# Altium PCB SX1278.PcbDoc
Units mil, origin at the board's own origin, x right, y up, seen from the top; angles counter-clockwise.
Board outline 2510 x 2954 mil, 2 copper layers (Top Layer, Bottom Layer); 58 components, 37 nets, 293 pads, 135 vias.
Unrouted connection lines stored in the file: 7.
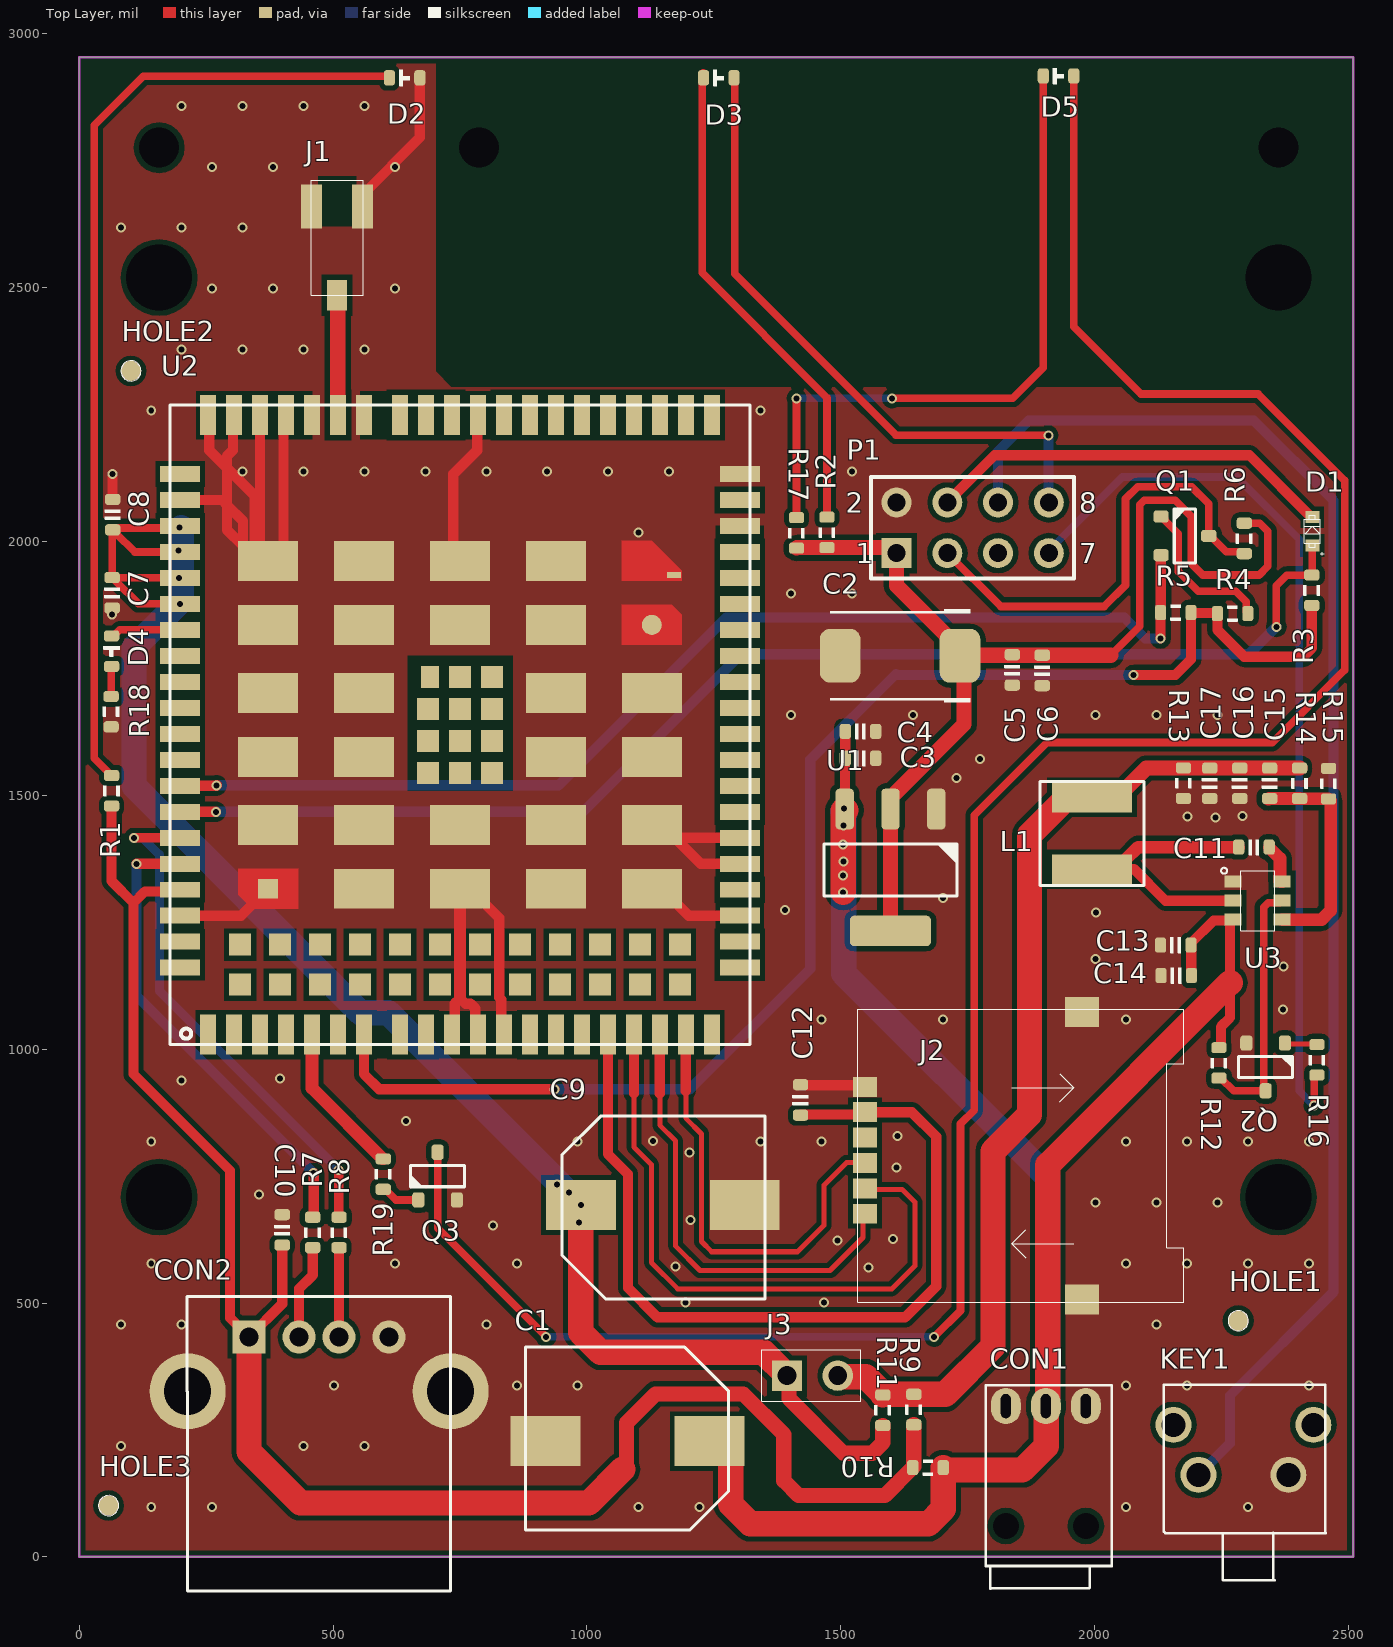
[diagram p0: Top Layer view]
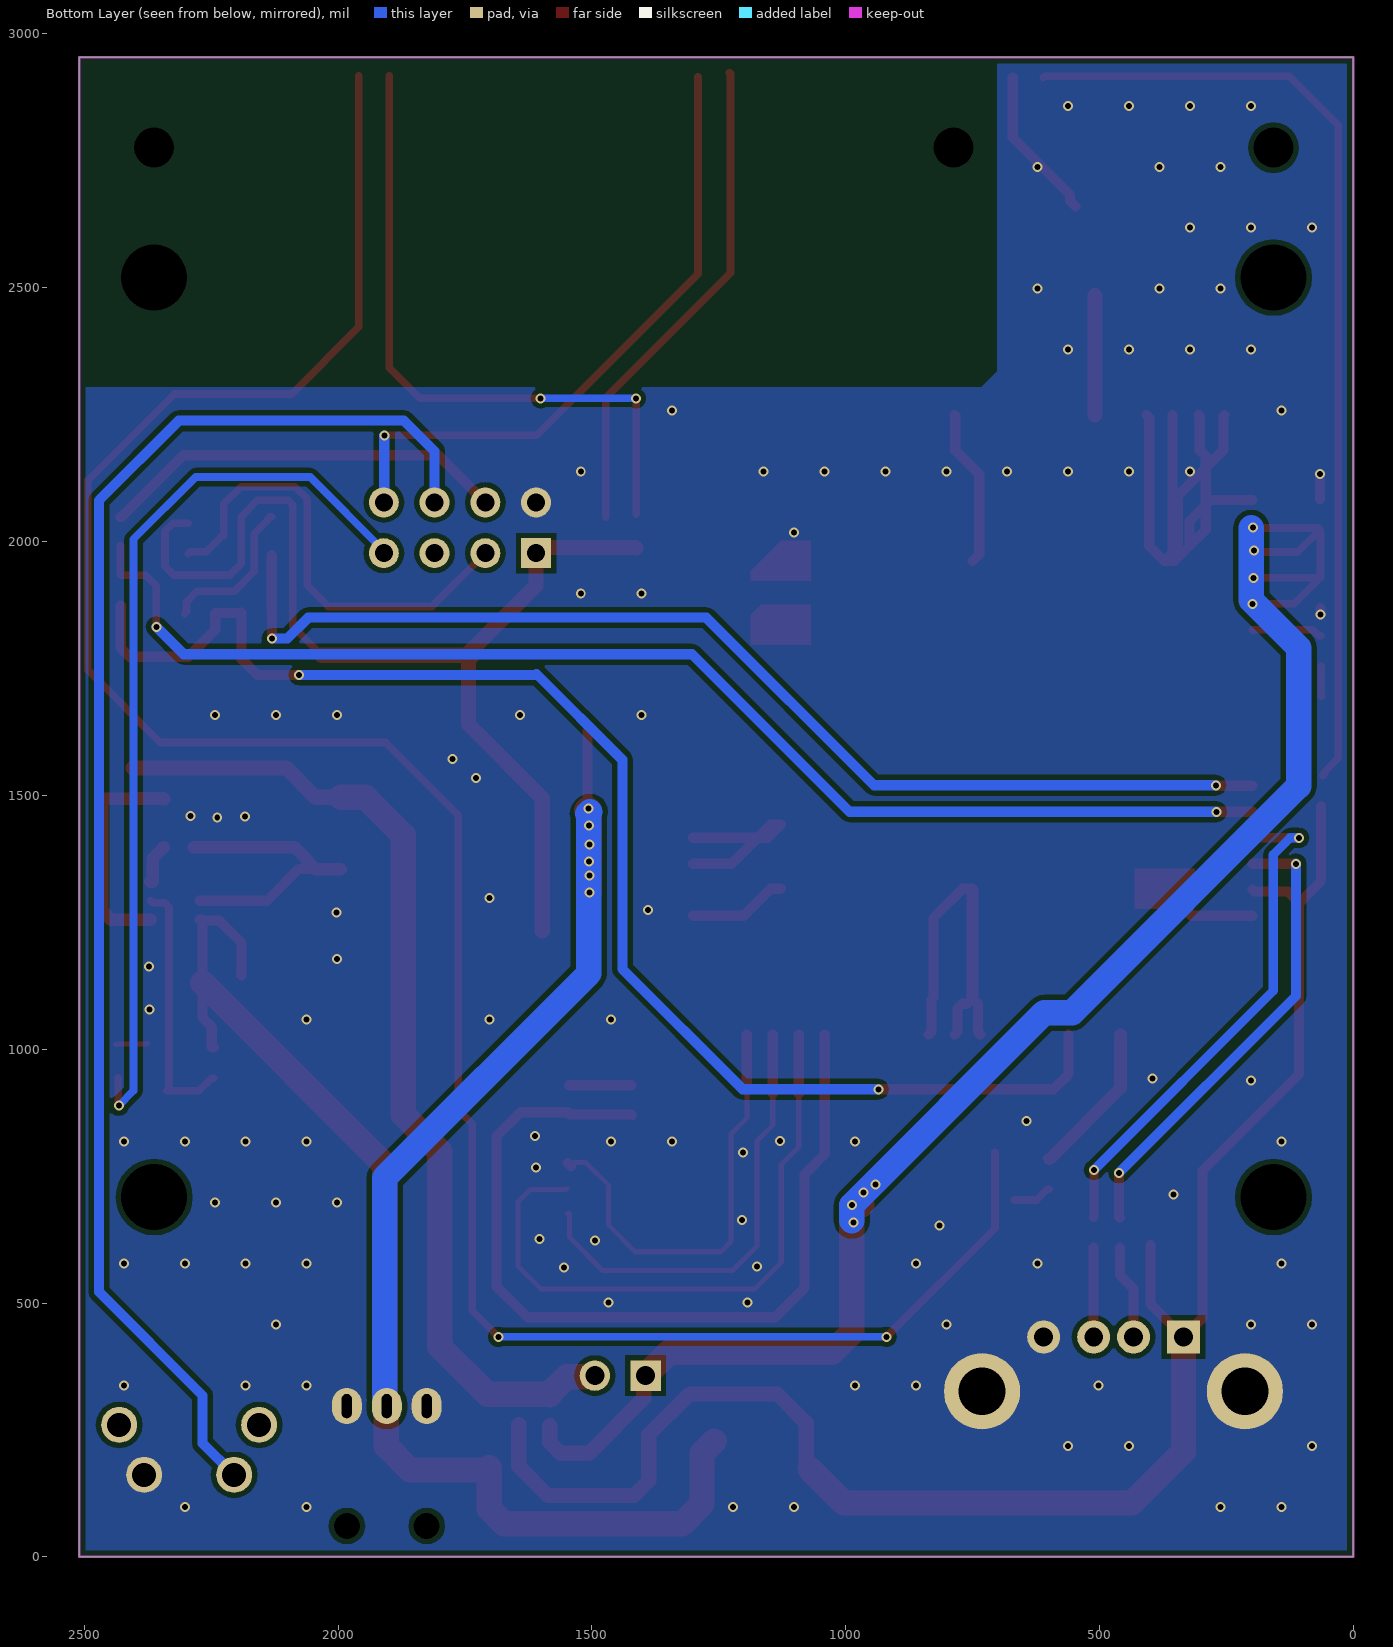
[diagram p1: Bottom Layer view, seen from below]
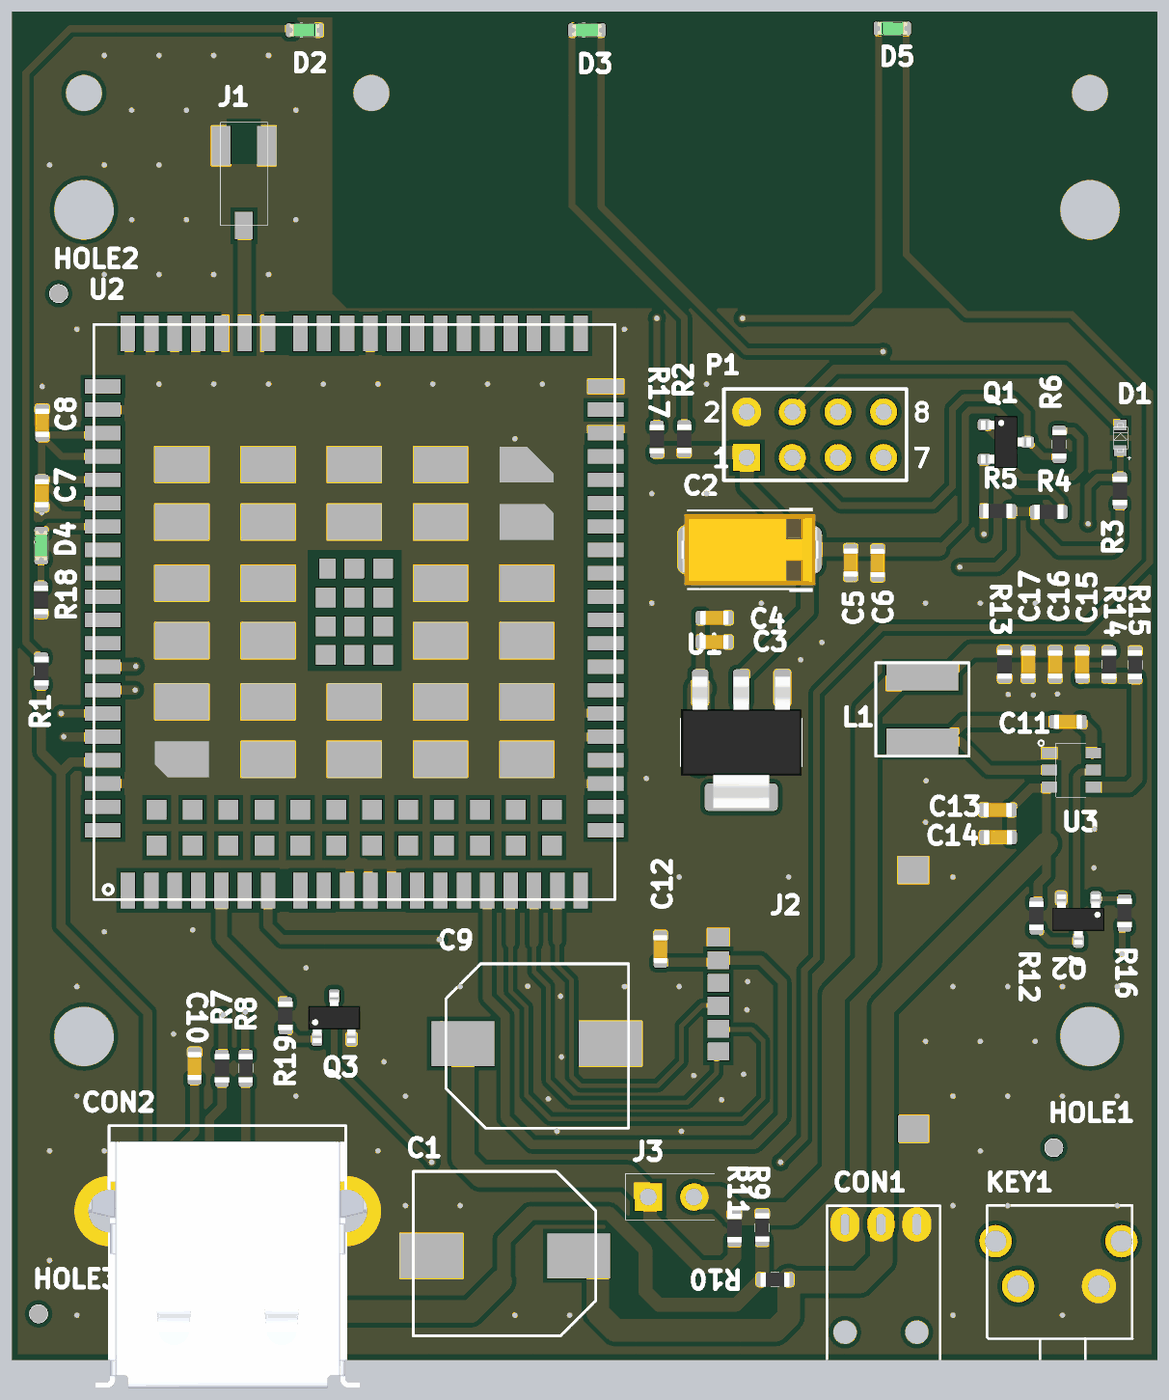
[diagram p2: 3D render of the assembled board from above, using the file's embedded part models]

## Layer stack, top to bottom
Top Solder: solder mask 0.4, Solder Resist, Dk 3.5
Top Layer: signal copper 1.4
Dielectric 1: dielectric 12.6, FR-4, Dk 4.8
Bottom Layer: signal copper 1.4
Bottom Solder: solder mask 0.4, Solder Resist, Dk 3.5

## Board outline
0,0 0,2954 2510,2954 2510,0

## Design rules (kind name [scope] priority, off if disabled: settings)
Clearance Clearance_9 [InNamedPolygon('Top Layer-GND')] p1: gap=10 ignorepadtopadclearanceinfootprint=FALSE except(0: Arc-Hole Track-Hole SMDPad-Hole THPad-Hole Via-Hole Fill-Hole Poly-Hole Region-Hole Text-Hole)
Clearance Clearance_8 [InNamedPolygon('Bottom Layer-GND')] p2: gap=10 ignorepadtopadclearanceinfootprint=FALSE
Clearance Clearance_7 [InNamedPolygon('Top Layer-GND')] p3: gap=30 ignorepadtopadclearanceinfootprint=FALSE
Clearance Clearance_6 [InNamedPolygon('Bottom Layer-GND')] p4: gap=30 ignorepadtopadclearanceinfootprint=FALSE
Clearance Clearance_5 [InNamedPolygon('Top Layer-GND')] p5: gap=30 ignorepadtopadclearanceinfootprint=FALSE
Clearance Clearance_4 [InNamedPolygon('Bottom Layer-GND')] p6: gap=10 ignorepadtopadclearanceinfootprint=FALSE except(0: Arc-Hole Track-Hole SMDPad-Hole THPad-Hole Via-Hole Fill-Hole Poly-Hole Region-Hole Text-Hole)
Clearance Clearance_3 [InNamedPolygon('Top Layer-N_IN')] p7: gap=10 ignorepadtopadclearanceinfootprint=FALSE except(0: Arc-Hole Track-Hole SMDPad-Hole THPad-Hole Via-Hole Fill-Hole Poly-Hole Region-Hole Text-Hole; 20: Arc-Arc Arc-Track Track-Track)
Clearance Clearance_2 [InNamedPolygon('Top Layer-N_IN')] p8: gap=10 ignorepadtopadclearanceinfootprint=FALSE except(0: Arc-Hole Track-Hole SMDPad-Hole THPad-Hole Via-Hole Fill-Hole Poly-Hole Region-Hole Text-Hole)
Clearance Clearance_1 [InNamedPolygon('Top Layer-N_IN')] p9: gap=10 ignorepadtopadclearanceinfootprint=FALSE except(0: Arc-Hole Track-Hole SMDPad-Hole THPad-Hole Via-Hole Fill-Hole Poly-Hole Region-Hole Text-Hole)
Clearance "Stitching No Net" [IsStitchingVia and InNet('No Net') vs (IsVia and (Not IsStitchingVia)) Or IsPad] p10: gap=39.37 ignorepadtopadclearanceinfootprint=FALSE
Clearance [All] p11: gap=6 ignorepadtopadclearanceinfootprint=FALSE
HoleSize [All] p1: absolutevalues=TRUE maxlimit=6000 minlimit=3 maxpercent=80.000 minpercent=20.000
HoleToHoleClearance [All] p1: gap=15.75 allowstackedmicrovias=TRUE
MinimumSolderMaskSliver [All] p1: minsoldermaskwidth=0
PlaneConnect [All] p1: planeconnectstyle=Direct reliefexpansion=20 reliefentries=4 reliefconductorwidth=10 reliefairgap=10
PolygonConnect [All] p1: connectstyle=Direct reliefconductorwidth=10 reliefentries=4 polygonreliefangle="90 Angle" airgapwidth=10
RoutingVias [All] p1: holewidth=11.81 width=19.68 viastyle="Through Hole" minholewidth=11.81 minwidth=19.68 maxholewidth=30.81 maxwidth=780.74
SilkToSilkClearance [All] p1: silktosilkclearance=0
SilkToSolderMaskClearance [IsPad] p1: minsilkscreentomaskgap=0 clearancetoexposedcopper=TRUE
SolderMaskExpansion [All] p1: expansion=1.97 useseparateexpansions=TRUE expansionbottom=1.97
Width [All] p1: maxlimit=200 minlimit=6 preferedwidth=10
24 further rules are at their usual default settings.

## Components (designator, comment, footprint, x,y, rotation, side; value= is the part's Value field where it differs from the comment)
C1 "CAP-AL-1000UF-8X10.5" CAP-AL-1000UF-10X12 1114,228 r180 top value=1000uF
C2 "NC" CAP_TAN_D2917 1617,1775 r180 top
C3 "106" CAP_0603 1539,1573 r180 top
C4 "104" CAP_0603 1539,1626 r180 top
C5 "106" CAP_0603 1838,1747 r90 top
C6 "104" CAP_0603 1897,1746 r90 top
C7 "106" CAP_0603 65,1899 r270 top
C8 "106" CAP_0603 66,2053 r90 top
C9 "CAP-AL-1000UF-8X10.5" CAP-AL-1000UF-10X12 1116,693 r0 top value=1000uF
C10 "106" CAP_0603 400,644 r270 top
C11 "104" CAP_0603 2314,1398 r0 top
C12 "106" CAP_0603 1421,900 r270 top
C13 "106" CAP_0603 2160,1205 r0 top
C14 "106" CAP_0603 2161,1145 r0 top
C15 "104" CAP_0603 2345,1523.76 r90 top
C16 "106" CAP_0603 2286,1523.76 r90 top
C17 "106" CAP_0603 2227,1523.76 r90 top
CON1 "PowerJack_2.5" DC003A 1786,-18 r0 top
CON2 "USB_TypeA" USB_TypeA 334.65,433.07 r180 top
D1 "DIODE-SCHOTTKY-RB521S-30" SOD523(RB521S) 2429.1,2020 r270 top
D2 "color?" LED_0603_GREEN 641,2913.39 r0 top
D3 "color?" LED_0603_GREEN 1259.84,2913.39 r0 top
D4 "color?" LED_0603_GREEN 64,1784 r270 top
D5 "color?" LED_0603_GREEN 1929.13,2917 r0 top
HOLE1 "TP-1.0MM" TP-1MM 2283,465 r90 top
HOLE2 "TP-1.0MM" TP-1MM 102,2336 r90 top
HOLE3 "TP-1.0MM" TP-1MM 58,101 r90 top
J1 "NC" RF-ANT-HJ 508,2660 r0 top
J2 "MICRO-SIM-S0HG-180006-03G" S0HG-180006-03G 1975,790 r270 top
J3 "DIP2X1-2.54" DIP2X1-2.54 1394.21,357 r0 top
KEY1 "KEY" key_4 2204.72,161.57 r0 top
L1 "LVS505020-4R7M-N" LVS505020-4R7M-N 1995,1425.13 r180 top value=6.8uH
P1 "Header 4X2" HDR2X4 1610,1977 r0 top
Q1 "FET-N-NTA4153NT1G" SOT23-3 2178,2011 r0 top
Q2 "9304" SOT23-3 2337,965 r270 top
Q3 "9304" SOT23-3 706,750 r90 top
R1 "10k" RES_0603 64,1509 r90 top
R2 "4.7k" RES_0603 1473,2018 r90 top
R3 "10K" RES_0603 2428,1904 r90 top
R4 "33" RES_0603 2272,1858 r0 top
R5 "10K" RES_0603 2160,1860 r180 top
R6 "10K" RES_0603 2295,2006 r270 top
R7 "NC" RES_0603 460,639 r90 top
R8 "NC" RES_0603 512,639 r90 top
R9 "0" RES_0603 1644,290.22 r270 top
R10 "NC" RES_0603 1672,176 r180 top
R11 "0" RES_0603 1583,289 r270 top
R12 "10K" RES_0603 2245,973 r270 top
R13 "4.7K" RES_0603 2175,1524 r90 top
R14 "100K" RES_0603 2404,1523.76 r90 top
R15 "18K" RES_0603 2461,1523 r270 top
R16 "10K" RES_0603 2438,979 r90 top
R17 "4.7K" RES_0603 1413,2017 r270 top
R18 "1K" RES_0603 63,1665 r90 top
R19 "10K" RES_0603 599,754 r270 top
U1 "LDO1117" SOT223-3 1598,1353 r270 top
U2 "AIR720_A14" AIR726-A 750.05,1638.83 r90 top
U3 "JW5033H" JW5033S 2321.23,1292.4 r270 top

## Footprints (in the part's own frame and the unit in brackets; to place one, negate y for a bottom-side part, rotate by r counter-clockwise, add the part's x,y. Pads: shape width x height; smd on the part's side, far side on the other; paste and mask are expansions set on the pad)
AIR726-A [mm]
  rect 2x0.8 smd: 1(-15.5,12.6) 2(-15.5,11.3) 3(-15.5,10) 4(-15.5,8.7) 5(-15.5,7.4) 6(-15.5,6.1) 7(-15.5,4.8) 8(-15.5,0.4) 9(-15.5,-0.9) 10(-15.5,-2.2) 11(-15.5,-3.5) 12(-15.5,-4.8) 13(-15.5,-6.1) 14(-15.5,-7.4) 15(-15.5,-8.7) 16(-15.5,-10) 17(-15.5,-11.3) 18(-15.5,-12.6) 37(15.5,-12.6) 38(15.5,-11.3) 39(15.5,-10) 40(15.5,-8.7) 41(15.5,-7.4) 42(15.5,-6.1) 43(15.5,-4.8) 44(15.5,-3.5) 45(15.5,-2.2) 46(15.5,-0.9) 47(15.5,0.4) 48(15.5,4.8) 49(15.5,6.1) 50(15.5,7.4) 51(15.5,8.7) 52(15.5,10) 53(15.5,11.3) 54(15.5,12.6) 141(-15.5,3) 142(-15.5,1.7) 143(15.5,1.7) 144(15.5,3)
  rect 0.8x2 smd: 19(-9.55,-14) 20(-8.25,-14) 21(-6.95,-14) 22(-5.65,-14) 23(-4.35,-14) 24(-3.05,-14) 25(-1.75,-14) 26(-0.45,-14) 27(0.85,-14) 28(2.15,-14) 29(3.45,-14) 30(4.75,-14) 31(6.05,-14) 32(7.35,-14) 33(8.65,-14) 34(9.95,-14) 35(11.25,-14) 36(12.55,-14) 55(12.55,14) 56(11.25,14) 57(9.95,14) 58(8.65,14) 59(7.35,14) 60(6.05,14) 61(4.75,14) 62(3.45,14) 63(2.15,14) 64(0.85,14) 65(-0.45,14) 66(-1.75,14) 67(-3.05,14) 68(-4.35,14) 69(-5.65,14) 70(-6.95,14) 71(-8.25,14) 72(-9.55,14) 113(-10.85,14) 114(-12.15,14) 115(-10.85,-14) 116(-12.15,-14)
  rect 1.1x0.9 smd: 73(2.4,1.5)
  rect 1.1x1.1 smd: 74(2.4,0) 75(2.4,-1.6) 76(0.8,1.6) 77(0.8,0) 78(0.8,-1.6) 79(-0.8,1.6) 80(-0.8,0) 81(-0.8,-1.6) 82(-2.4,1.6) 83(-2.4,0) 84(-2.4,-1.6) 117(-11,11) 118(-11,9) 119(-11,7) 120(-11,5) 121(-11,3) 122(-11,1) 123(-11,-1) 124(-11,-3) 125(-11,-5) 126(-11,-7) 127(-11,-9) 128(-11,-11) 129(-13,11) 130(-13,9) 131(-13,7) 132(-13,5) 133(-13,3) 134(-13,1) 135(-13,-1) 136(-13,-3) 137(-13,-5) 138(-13,-7) 139(-13,-9) 140(-13,-11)
  rect 2x3 smd: 85(8.2,9.6) 86(8.2,4.8) 87(8.2,0) 88(8.2,-4.8) 90(5,9.6) 91(5,4.8) 92(5,0) 93(5,-4.8) 95(1.6,9.6) 96(1.6,4.8) 97(1.6,-4.8) 98(1.6,-9.6) 99(-1.6,9.6) 100(-1.6,4.8) 101(-1.6,-4.8) 102(-1.6,-9.6) 103(-5,9.6) 104(-5,4.8) 105(-5,0) 106(-5,-4.8) 107(-5,-9.6) 109(-8.2,4.8) 110(-8.2,0) 111(-8.2,-4.8) 112(-8.2,-9.6)
  rect 0.3x0.7 smd: 89(7.5,-10.7)
  round 1 smd: 94(5,-9.6)
  rect 1x1 smd: 108(-8.2,9.6)
  Top Layer pour cut-out: 14.3,13.2 16.7,13.2 16.7,7.4 14.3,7.4 14.3,13.2
  Top Layer pour cut-out: -3.3,2.6 3.45,2.6 3.45,-2.65 -3.3,-2.65 -3.3,2.6
  Top Layer pour cut-out: -14.3,-13.2 -16.7,-13.2 -16.7,13.2 -14.3,13.2 -14.3,-13.2
  Top Layer pour cut-out: 9.95,-15.2 -12.8,-15.2 -12.8,-12.8 9.95,-12.8 9.95,-15.2
  Top Layer pour cut-out: 14.3,5 16.7,5 16.7,-13.2 14.3,-13.2 14.3,5
  Top Layer pour cut-out: -12.8,15.2 13.15,15.2 13.15,12.8 -12.8,12.8 -12.8,15.2
  Top Layer region: -8.5,11.1 -9.2,10.4 -9.2,8.1 -7.2,8.1 -7.2,11.1 -8.5,11.1
  Top Layer region: 4,-8.1 6,-8.1 6,-10.6 5.5,-11.1 4,-11.1 4,-8.1
  Top Layer region: 7.2,-8.1 9.2,-8.1 9.2,-9.6 7.7,-11.1 7.2,-11.1 7.2,-8.1
  silkscreen extent -16,-14.5 16,14.5
CAP-AL-1000UF-10X12 [mm]
  rect 3.5x2.5 smd: 1(-3.25,0) 2(4.953,0)
  silkscreen extent -4.2,-4.7 5.97,4.45
CAP_0603 [mil]
  rrect50% 22x30 smd: 1(-30,0) 2(30,0)
  silkscreen extent -10,-15 10,15, body extent -31,-16 31,16, height 31
CAP_TAN_D2917 [mil]
  rrect50% 80x106 smd: 1(-118,0) 2(118,0)
  silkscreen extent -138,-92 138,92, body extent -150,-78 150,78, height 122
DC003A [mm] "DC003A 母座 3.5*1.3"
  oval 1.5x1.8 hole 0.5 slot 1.2 at 90 deg: 1(3,8) 2(1,8) 3(5,8)
  round 0 hole 1.3: ""(1,2) ""(5,2)
  silkscreen extent 0,-1.14 6.3,9.04
DIP2X1-2.54 [mil]
  rect 60x60 hole 37: 1(0,0)
  round 60 hole 37: 2(100,0)
  silkscreen extent -50,-50 146,51
HDR2X4 [mm] "Connector; Header; 4x2 Position"
  rect 1.5x1.5 hole 0.9: 1(0,0)
  round 1.5 hole 0.9: 2(0,2.54) 3(2.54,0) 4(2.54,2.54) 5(5.08,0) 6(5.08,2.54) 7(7.62,0) 8(7.62,2.54)
  silkscreen extent -1.27,-1.27 8.89,3.81
JW5033S [mm]
  rect 0.6x0.85 smd: 1(-0.95,-1.225) 2(0,-1.225) 3(0.95,-1.225) 4(0.95,1.225) 5(0,1.225) 6(-0.95,1.225)
  silkscreen extent -1.65,-1.83 1.5,0.85
key_4 [mm]
  round 1.8 hole 1.2: 1(0,0) 2(4.5,0) ""(-1.25,2.5) ""(5.75,2.5)
  silkscreen extent -1.73,-5.28 6.38,4.5
LED_0603_GREEN [mil]
  rrect50% 22x30 smd: 1(-30,0) 2(30,0)
  silkscreen extent -10,-16 10,16, body extent -32,-16 32,16, height 24
LVS505020-4R7M-N [mm]
  rect 4x1.5 smd: 1(0,1.8) 2(0,-1.8)
  silkscreen extent -2.6,-2.6 2.6,2.6
RES_0603 [mil]
  rrect50% 22x30 smd: 1(-30,0) 2(30,0)
  silkscreen extent -10,-16 10,16, body extent -31,-16 31,16, height 18
RF-ANT-HJ [mm]
  rect 1.05x2.2 smd: 1(-1.27,0) 3(1.27,0)
  rect 1x1.533 smd: 2(0,-4.445)
  Top Layer pour cut-out: -0.95,1.5 0.95,1.5 0.95,-1.003 -0.95,-1.003 -0.95,1.5
  silkscreen extent -1.3,-4.44 1.3,1.3
S0HG-180006-03G [mm]
  rect 1x1.2 smd: 1(1.63,-10.85) 2(-0.91,-10.85) 3(-3.45,-10.85) 4(-2.18,-10.85) 5(0.36,-10.85) 6(2.9,-10.85)
  rect 1.5x1.7 smd: 7(-7.2,0) 8(7.2,0)
  silkscreen extent -7.33,-11.2 7.33,5.1
SOD523(RB521S) [mm]
  rect 0.6x0.7 smd: 1(-0.71,0) 2(0.71,0)
  silkscreen extent -0.8,-0.4 1.2,0.59
SOT23-3 [mil]
  rrect50% 30x24 smd: 1(-47,38) 2(-47,-38) 3(47,0)
  silkscreen extent -21,-53 21,53, body extent -55,-57 55,57, height 51
SOT223-3 [mil]
  rrect40% 80x36 smd: 1(-120,90.16) 2(-120,0) 3(-120,-90.16)
  rrect30% 60x160 smd: 4(120,0)
  silkscreen extent -51,-131 51,131, body extent -144,-132 144,132, height 71
TP-1MM [mil]
  round 40 smd: 1(0,0)
  Top Layer pour cut-out: 26.18,0 26.15,1.37 26.04,2.74 25.86,4.1 25.61,5.44 25.29,6.78 24.9,8.09 24.44,9.38 23.92,10.65 23.33,11.89 22.67,13.09 21.96,14.26 21.18,15.39 20.35,16.48 19.46,17.52 18.51,18.51 17.52,19.46 16.48,20.35 15.39,21.18 14.26,21.96 13.09,22.67 11.89,23.33 10.65,23.92 9.38,24.44 8.09,24.9 6.78,25.29 5.44,25.61 4.1,25.86 2.74,26.04 1.37,26.15 0,26.18 -1.37,26.15 -2.74,26.04 -4.1,25.86 -5.44,25.61 -6.78,25.29 -8.09,24.9 -9.38,24.44 -10.65,23.92 -11.89,23.33 -13.09,22.67 -14.26,21.96 -15.39,21.18 -16.48,20.35 -17.52,19.46 -18.51,18.51 -19.46,17.52 -20.35,16.48 -21.18,15.39 -21.96,14.26 -22.67,13.09 -23.33,11.89 -23.92,10.65 -24.44,9.38 -24.9,8.09 -25.29,6.78 -25.61,5.44 -25.86,4.1 -26.04,2.74 -26.15,1.37 -26.18,0 -26.15,-1.37 -26.04,-2.74 -25.86,-4.1 -25.61,-5.44 -25.29,-6.78 -24.9,-8.09 -24.44,-9.38 -23.92,-10.65 -23.33,-11.89 -22.67,-13.09 -21.96,-14.26 -21.18,-15.39 -20.35,-16.48 -19.46,-17.52 -18.51,-18.51 -17.52,-19.46 -16.48,-20.35 -15.39,-21.18 -14.26,-21.96 -13.09,-22.67 -11.89,-23.33 -10.65,-23.92 -9.38,-24.44 -8.09,-24.9 -6.78,-25.29 -5.44,-25.61 -4.1,-25.86 -2.74,-26.04 -1.37,-26.15 0,-26.18 1.37,-26.15 2.74,-26.04 4.1,-25.86 5.44,-25.61 6.78,-25.29 8.09,-24.9 9.38,-24.44 10.65,-23.92 11.89,-23.33 13.09,-22.67 14.26,-21.96 15.39,-21.18 16.48,-20.35 17.52,-19.46 18.51,-18.51 19.46,-17.52 20.35,-16.48 21.18,-15.39 21.96,-14.26 22.67,-13.09 23.33,-11.89 23.92,-10.65 24.44,-9.38 24.9,-8.09 25.29,-6.78 25.61,-5.44 25.86,-4.1 26.04,-2.74 26.15,-1.37 26.18,0
  silkscreen extent -20,-20 20,20
USB_TypeA [mil]
  rect 65x65 hole 37: 1(0,0)
  round 65 hole 37: 2(-98.5,0) 3(-177,0) 4(-275.6,0)
  round 150 hole 93: 4(-397,107) 4(121,107)
  silkscreen extent -397,-80 122,500, body extent -449,-45 173,494, height 274

## Part data
C1 C9: "贴片电解电容,1000uF/10V", Geometry.Height="10.4 mm", PCB DECAL=CAP-AL-1000UF-8X10.5
C2: library part Cap_Tan_2917, "Capacitor Tantalum", Type=2917
C3 C4 C5 C6 C7 C8 C10 C11 C12 C13 C14 C15 C16 C17: library part Cap_0603, "Capacitor", Type=0603
CON1: "DC Power Jack"
CON2: "USB"
D1: "Schottky Diode;30V;200mA/0.6V;SOD-523;0.7mm;ROHS", Manufacture 1=Panjit;WILL;KEC;Onsemi;, Manufacture 1 P/N=RB521S30T1G;KDR730E;RB521S30-2/TR;RB521S30/TR, Geometry.Height=0.7mm, PCB DECAL=SOD523(RB521S), Serial Number=81210000004
D2 D3 D4 D5: library part LED_0603, "LED", Type=0603
HOLE1 HOLE2 HOLE3: "TP-1mm", Geometry.Height=0.05mm, PCB DECAL=TP-1MM
J1: library part RF-ANT-SOCKET-U.FL-R-SMT, "RF CONNECTOR;3*3*1.25mm;ROHS", Manufacture 1=Hirose, Manufacture 1 P/N=U.FL-R-SMT, Part Number=1120333002051, Geometry.Height=1.25mm, PCB DECAL=RF-ANT-SOCKET-U.FL-R-SMT, Serial Number=80830000004
J2: "1.8H掀盖 Micro SIM卡座;16.3*14.66*1.8mm", Manufacture 1=深圳市精睿兴业科技有限公司, Manufacture 1 P/N=S0HG-180006-03G, Geometry.Height=1.8mm, PCB DECAL=S0HG-180006-03G
L1: Manufacture 1=Chilisin(奇力新), Geometry.Height="2.2 mm", PCB DECAL=LVS505020-4R7M-N
P1: "Header, 4-Pin, Dual row", LatestRevisionDate=17-Jul-2002, LatestRevisionNote="Re-released for DXP Platform.", Publisher="Altium Limited"
Q1: "MOSFET;N-Ch", Manufacture 1 P/N=WNM2030, Geometry.Height=0.55mm, PCB DECAL=SOT-723
Q2 Q3: library part BJT_NPN, "Transistor", Type=NPN
R1 R2 R3 R4 R5 R6 R7 R8 R9 R10 R11 R12 R13 R14 R15 R16 R17 R18 R19: library part Res_0603, "Resistor", Type=0603
U1: "Power", Type=SOT223-3
J3: Geometry.Height=2mm, PCB DECAL=DIP2X1-2.54
U2: PCB DECAL=AIR726
U3: Geometry.Height=1.1mm, PCB DECAL=JW5033S

## Free pads (board coordinates)
  round 0 hole 129.92: 0(157.48,708.66) 0(157.48,2519.68) 0(2362.2,708.66) 0(2362.2,2519.68)
  round 0 hole 78.74: 0(157.48,2775.59) 0(787.4,2775.59) 0(2362.2,2775.59)

## Via types
v1: diameter 19.68, hole 11.81, Top Layer to Bottom Layer, tented both sides, 135 vias

## Nets (pads, with @x,y where several pads share a name; then routed paths per layer and width w, separated by ;. In a path a pad name is that pad's centre, name@x,y a point inside that pad or via, vN(x,y) a via of type N, cw(c..) or ccw(c..) an arc to the next point about the centre after c; other vN are vias at no path point)
1V8: R3.1 R4.1 R5.1 U2.7 | length 2788.7
  Top Layer w20: U2.7 561.07,950.93 591,921 v1(936,921) ; v1(2077,1737) 2159,1737 2190,1768 R5.1 2191,1859 2241,1859 R4.1 2242,1826 2295,1773 2411,1773 2428,1790 R3.1
  Bottom Layer w20: v1(936,921) 1203,921 1440,1158 1440,1570 1609,1739 1611,1737 v1(2077,1737)
3V3: C2.1 C5.2 C6.2 P1.1 R2.1 R6.1 R17.2 U1.2 U1.4 | length 2177.9
  Top Layer w15: 2032,1776 2089,1833 2089,2072 2098,2081 2159,2081 2191,2049 2191,1956 2213,1934 2324,1934 2341,1951 2341,2020 2325,2036 R6.1
  Top Layer w30: R17.2 1414,1988 R2.1 1599,1988 P1.1 1610,1913 1743,1780 C2.1@1743,1776 ; U1.4 U1.2 1598,1495 1743,1640 C2.1@1743,1776 ; C2.1 1736,1776 C2.1@1743,1776 ; 2032,1776 C6.2 C2.1@1743,1776
4G_RX: D1.2 R3.2 U2.68 | length 2527.5
  Top Layer w15: v1(2358,1832) 2358,1913 2378.5,1933.5 2427.5,1933.5 R3.2 2428.55,1934.55 D1.2@2428.55,1991.5
  Top Layer w20: U2.68 v1(269.57,1467.57)
  Bottom Layer w20: v1(269.57,1467.57) 992.57,1467.57 1303,1778 2304,1778 v1(2358,1832)
4G_TX: Q1.2 R5.2 U2.67 | length 2250.1
  Top Layer w20: U2.67@199.11,1519 U2.67 270,1518.76 v1(271,1519.76) ; v1(2130,1809) R5.2 2130.5,1860.5 2130.5,1972.5 Q1.2
  Bottom Layer w20: v1(271,1519.76) 944.38,1519.76 1274.62,1850 2059,1850 2100,1809 v1(2130,1809)
6V: C1.1 C3.2 C4.2 C13.2 C14.2 CON1.1 R10.1 R12.1 U1.3 U3.3 | length 3982.9
  Top Layer w20: U1.3 1508.42,1473.58 1508.42,1572.42 C3.2 C4.2 ; C14.2 2190.5,1145.5 2190.5,1204.5 C13.2 2190,1209 2234.19,1253.19 U3.3@2267,1253.19 ; R12.1 2247.81,1003 2248.81,1004 2248.81,1044 2267,1062.19 2267,1131 U3.3@2267,1249 ; U3.3@2267,1253.19 2271.19,1253.19 U3.3 2268.81,1255 U3.3@2267,1253.19
  Top Layer w50: C1.1@1259,228 1283.21,203.79 1283.21,103.79 1322,65 1672.71,65 1702,94.29 R10.1 ; v1(1505,1309) v1@1505,1341 ; v1(1505,1342) v1(1505,1403) 1505,1470.16 U1.3 U1.3@1510,1470.84 ; R10.1@1707,171 1858,171 1905,218 CON1.1@1905,279.98 ; CON1.1@1907.98,313.43 1907.98,771.98 2267,1131
  Bottom Layer w50: v1@1504,1468 1508,1464 1506,1462 v1(1506,1441) v1(1506,1370) 1506,1149 1908,747 1908,326.22 CON1.1@1907.98,313.43
  other v1: 1506.84,1474
GND: C1.2 C2.2 C3.1 C4.1 C5.1 C6.1 C7.2 C8.2 C9.2 C10.1 C12.1 C13.1 C14.1 C16.1 C17.1 CON1.2 CON1.3 CON2.4 D2.2 J1.1 J1.3 J2.3 J2.7 J2.8 KEY1.2 P1.2 Q2.2 Q3.2 R13.1 R15.1 R18.1 U1.1 U2.8 U2.9 U2.10 U2.19 U2.21 U2.22 U2.34 U2.36 U2.46 U2.48 U2.50 U2.51 U2.52 U2.53 U2.54 U2.56 U2.72 U2.85 U2.86 U2.87 U2.88 U2.89 U2.90 U2.91 U2.92 U2.93 U2.94 U2.95 U2.96 U2.97 U2.98 U2.99 U2.100 U2.101 U2.102 U2.103 U2.104 U2.105 U2.106 U2.107 U2.108 U2.109 U2.110 U2.111 U2.112 U3.1 | length 3963.1
  Top Layer w10: J2.3@1543.66,930 1544.66,929 J2.3
  Top Layer w20: v1(65,1856) C7.2 ; C8.2 v1(66,2132.76) ; U2.72 318.94,1262.85 U2.108 ; U2.56 281.25,2081.75 291,2072 ; U2.54 256.3,2246.76 256.3,2179.7 291,2145 ; U2.53 302.72,2246.62 302.72,2179.7 291,2167.98 291,2145 ; U2.52 U2.85@356.35,1977.42 ; U2.51 402.16,2243.7 402.16,1991.04 372.79,1961.67 U2.85 ; J1.3@547.33,2660 558,2670.67 558,2682.64 671,2795.64 D2.2 ; U2.8 739.73,1034.03 739.73,1090.14 748.33,1098.74 U2.110@748.33,1314.28 ; U2.87 737,1974.72 737,2132.48 784.22,2179.7 784.22,2247.81 U2.46 ; U2.9 780.05,1034.03 780.05,1080.39 771.07,1089.37 761.14,1089.37 751.76,1098.74 751.76,1310.85 U2.110@748.33,1314.28 ; U2.10 831.28,1033.98 831.28,1097.97 827.39,1101.86 827.39,1258.35 769.73,1316 U2.110 U2.110@748.33,1314.28 ; U2.112 1147.68,1316 1200.83,1262.85 U2.19 ; U2.21 1224.46,1365.21 U2.107@1173.28,1416.39 ; U2.22 U2.107@1173.28,1416.39 ; C12.1@1422,929 J2.3@1544.66,929 ; 291,2072 323.04,2039.96 U2.85@323.04,1991.04 ; 291,2072 291,2145 ; 291,2072 291,2023.08 U2.85@323.04,1991.04 ; 291,2145 345.97,2090.03 345.97,1987.8 U2.85@356.35,1977.42 ; U2.85@323.04,1991.04 352.41,1961.67 U2.85 ; U2.85@356.35,1977.42 U2.85 ; U2.107@1173.28,1416.39 1147.68,1441.98 U2.107 1153.59,1416.39 U2.107@1173.28,1416.39
  other v1: 142,98 262,98 1102,98 1222,98 2062,98 2302,98 82,218 442,218 562,218 502,338 862,338 982,338 2062,338 2182,338 2422,338 82,458 202,458 802,458 2122,458 1194,501 1467,501 1555,570 1175,572 142,578 622,578 862,578 2062,578 2182,578 2302,578 2422,578 1494,623 1603.17,626 815,653 1204,664 2002,698 2122,698 2242,698 354,714 1610.41,767 1202,796.79 142,818 982,818 1342,818 1462,818 2062,818 2182,818 2302,818 2422,818 1130,819 1612,829 644,859.01 202,938 396,942 1462,1058 1702,1058 2062,1058 2371,1078 2372,1163 2002,1178 2003,1269 1390,1274 1702,1298 2238,1456.65 2183,1458 2291,1459 1728.24,1534 1774.73,1572 1402,1658 1642,1658 2002,1658 2122,1658 2242,1658 1402,1898 1522,1898 1102,2018 322,2138 442,2138 562,2138 682,2138 802,2138 922,2138 1042,2138 1162,2138 1522,2138 142,2258 1342,2258 202,2378 322,2378 442,2378 562,2378 262,2498 382,2498 622,2498 82,2618 202,2618 322,2618 262,2738 382,2738 622,2738 202,2858 322,2858 442,2858 562,2858
IO15: P1.7 R16.1 | length 1791.3
  Top Layer w15: v1(2432,889) 2432.9,889.9 R16.1@2432.9,943.9
  Bottom Layer w15: P1.7 1910,1982 2055,2127 2280,2127 2403,2004 2403,918 v1(2432,889)
MIFI_BAT: C15.2 C16.2 C17.2 J3.2 L1.2 R9.1 R11.1 R13.2 R14.2 | length 1986
  Top Layer w30: L1.2 2044.21,1496 2101.97,1553.76 C17.2 C16.2 C15.2 R14.2
  Top Layer w50: J3.2 1496.13,355.09 1549.35,355.09 R11.1@1584.22,320.22 ; R11.1 R11.1@1584.22,320.22 ; L1.2 1945.79,1496 1872,1422.21 1872,871 1800,799 1800,414.22 1706,320.22 R9.1 R11.1@1584.22,320.22
NET_MODE: R19.1 U2.5 | length 303.3
  Top Layer w25: U2.5 458.71,923.29 598,784 R19.1
NET_PWM: D4.1 U2.61 | length 140.5
  Top Layer w15: D4.1 68,1814 79.84,1825.84 197.18,1825.84 198.02,1825 U2.61
NetC11_1: C11.1 L1.1 U3.2 | length 579.2
  Top Layer w20: L1.1@2028,1355.13 2045.08,1355.13 2077.21,1355.13 2139.94,1292.4 U3.2
  Top Layer w25: L1.1 2044.21,1354.27 2045.08,1355.13 2061.24,1371.3 2061.24,1373.24 2086,1398 C11.1
NetC11_2: C11.2 U3.6 | length 80.8
  Top Layer w25: C11.2 2344,1397 2365.22,1375.78 2365.22,1330.49 2365.91,1329.8 U3.6
NetC15_1: C15.1 R14.1 R15.2 U3.4 | length 439
  Top Layer w25: C15.1@2342.5,1492.26 C15.1@2344,1493.76 ; C15.1 R14.1 2404.38,1493.38 R15.2@2460.62,1493.38 ; U3.4 2447,1255 2465,1273 2465,1489 R15.2@2463.5,1490.5
NetCON2_2: CON2.2 R7.1 | length 188.7
  Top Layer w20: CON2.2@432.57,433.64 CON2.2 433.15,528.15 460,555 R7.1 R7.1@460.57,608.43
NetCON2_3: CON2.3 R8.1 | length 176.1
  Top Layer w20: CON2.3 511.82,433.25 511.82,608.82 R8.1
NetD2_1: D2.1 R1.2 | length 1915.7
  Top Layer w15: R1.2@60,1539 56.5,1542.5 56.5,1546.5 30,1573 30,2820 126.5,2916.5 607.89,2916.5 D2.1
NetD3_1: D3.1 R2.2 | length 977.7
  Top Layer w15: D3.1@1229,2923 1227,2921 1227,2529 1473,2283 R2.2
NetD3_2: D3.2 P1.8 | length 1270.1
  Top Layer w15: D3.2@1291,2915 1291,2527 1609,2209 v1(1909,2209)
  Bottom Layer w20: v1(1909,2209) 1909,2078 P1.8
NetD4_2: D4.2 R18.2 | length 59.4
  Top Layer w15: R18.2 63.5,1695.5 63.5,1753.5 D4.2
NetD5_1: D5.1 R17.1 | length 1310.9
  Top Layer w15: R17.1@1413,2054 v1@1413,2279 ; v1(1601,2282) 1839,2282 1899.13,2342.13 D5.1
  Bottom Layer w15: v1(1413,2282) v1(1601,2282)
NetD5_2: D5.2 Q3.3 | length 4652
  Top Layer w15: Q3.3 706,647 v1(919.75,433.25) ; v1(1684.25,433.25) 1736,485 1736,853 1763,880 1763,1461 1906,1604 2350,1604 2492.91,1746.91 2492.91,2120.09 2322.57,2290.43 2091.57,2290.43 1959.13,2422.87 D5.2
  Bottom Layer w15: v1(919.75,433.25) v1(1684.25,433.25)
NetJ1_2: J1.2 U2.49 | length 237
  Top Layer w20: J1.2 J1.2@508.94,2484.06 ; U2.49@508.94,2250.02 509.14,2249.82 U2.49
  Top Layer w30: J1.2@508.94,2484.06 509.14,2483.86 U2.49@509.14,2249.82
NetQ1_1: Q1.1 R4.2 | length 306.9
  Top Layer w15: Q1.1 2134,2049 2138.5,2044.5 2138.5,2041.5 2165,2015 2165,1941 2204,1902 2278,1902 2298.5,1881.5 2298.5,1861.5 R4.2
NetQ2_1: Q2.1 R16.2 | length 64.2
  Top Layer w10: Q2.1 2376.5,1010.5 2436.5,1010.5 R16.2
NetQ2_3: Q2.3 R12.2 U3.5 | length 507.1
  Top Layer w15: R12.2 2249,943 2274,918 Q2.3 2333.09,921.91 2333.09,1279.3 2341.88,1288.09 2365.15,1288.09 U3.5
NetQ3_1: Q3.1 R19.2 | length 77.7
  Top Layer w15: R19.2 603,724 624,703 Q3.1
NRESET: KEY1.1 P1.6 | length 2881.6
  Bottom Layer w20: P1.6 1810,2178 1870,2238 2314,2238 2471,2081 2471,522 2267,318 2267,223.85 KEY1.1
RX: P1.3 Q1.3 R6.2 | length 917.4
  Top Layer w15: P1.3 1815,1872 2019,1872 2061,1914 2061,2084 2085,2108 2191,2108 2225,2074 Q1.3 2228,2011 2259.5,1979.5 2291.5,1979.5 R6.2
TX: D1.1 P1.4 | length 808.2
  Top Layer w20: P1.4 1803,2170 2305.09,2170 2427.13,2047.95 D1.1
USB_DM: R7.2 U2.70 | length 926.8
  Top Layer w20: v1(113.21,1365.21) U2.70 ; R7.2 461,669 R7.2@462,670 ; R7.2@462,671 v1(462,756)
  Bottom Layer w20: v1(113.21,1365.21) 113.21,1104.79 v1(462,756)
USB_DP: R8.2 U2.69 | length 1016.1
  Top Layer w18: v1(107.61,1416.39) U2.69 ; v1(511,762) 511.32,761.68 511.32,669.68 R8.2
  Bottom Layer w18: v1(107.61,1416.39) 124.61,1416.39 158,1383 158,1115 v1(511,762)
USIM_CLK: J2.6 U2.16 | length 896.1
  Top Layer w10: 1143.75,912.87 1143.75,850.25 1175,819 1175,612 1223,564 1479,564 1543.9,628.9 1543.9,675.83 J2.6
  Top Layer w20: 1143.75,912.87 U2.16
USIM_DATA: J2.1 U2.15 | length 1257.3
  Top Layer w10: 1092.57,912.43 1092.57,807.43 1127,773 1127,580 1179,528 1601,528 1646,573 1646,699 1621,724 1549.66,724 J2.1
  Top Layer w20: 1092.57,912.43 U2.15
USIM_RST_N: J2.5 U2.17 | length 875.8
  Top Layer w10: 1194.93,918.07 1194.93,864.07 1226,833 1226,620.95 1245.95,601 1415,601 1467,653 1467,732 1512,777 1533.43,777 J2.5@1541.22,769.21
  Top Layer w20: 1194.93,918.07 U2.17 ; J2.5@1541.22,769.21 J2.5
VBAT: C7.1 C8.1 C9.1 J3.1 R11.2 U2.57 U2.58 U2.59 U2.60 | length 3493.5
  Top Layer w15: C8.1@65,2018 C7.1 65.8,1928.2 C7.1@69.8,1928.2 ; C8.1 69.5,2026.5 194.8,2026.5 U2.57 ; C7.1@69,1929 C7.1@69.8,1928.2 ; C8.1@70,2023 73.5,2019.5 73.5,2015.5 109.61,1979.39 U2.58 ; U2.60 116.98,1877.02 72.5,1921.5 72.5,1925.5 C7.1@69.8,1928.2 ; U2.59 C7.1@69.8,1928.2
  Top Layer w30: J3.1 1398,353.21 1398,312 1506,204 1562,204 1583,225 R11.2
  Top Layer w50: C9.1@968.36,693 v1(988.05,693) 988.05,441.95 1027,403 1348.21,403 J3.1
  Bottom Layer w50: v1@201,2027 201,1884 108,1791 108,1518 554.2,1071.8 609.25,1071.8 v1(988.05,693) v1@988.05,662.05
  other v1: 985,659 964.84,718 941,733 199,1877 197,1928 196,1982 198,2028
VBUS: C10.2 CON2.1 R1.1 R9.2 R10.2 U2.71 | length 3423.1
  Top Layer w20: R1.1 64,1331 107,1288 ; U2.71 195.33,1310.5 129.5,1310.5 107,1288 ; C10.2 400,498.43 CON2.1 297,470.72 297,761 107,951 107,1288
  Top Layer w30: 1070.5,172.5 1078,180 1078,264 1135,321 1308,321 1388,241 1388,150 1417,121 1587,121 R10.2 ; R10.2@1644,178 R9.2
  Top Layer w50: CON2.1 334.65,207.35 436,106 1004,106 1070.5,172.5
VCC_USIM: C12.2 J2.4 U2.14 | length 1755.7
  Top Layer w20: U2.14 1041.39,793.44 1081,753.83 1081,530 1139,472 1627,472 1688.16,533.16 1688.16,827.84 1640.17,875.83 J2.4 1543.01,871 1422,871 C12.2
pads on no net: CON1. HOLE1.1 HOLE2.1 HOLE3.1 J2.2 KEY1. P1.5 U2.1 U2.2 U2.3 U2.4 U2.6 U2.11 U2.12 U2.13 U2.18 U2.20 U2.23 U2.24 U2.25 U2.26 U2.27 U2.28 U2.29 U2.30 U2.31 U2.32 U2.33 U2.35 U2.37 U2.38 U2.39 U2.40 U2.41 U2.42 U2.43 U2.44 U2.45 U2.47 U2.55 U2.62 U2.63 U2.64 U2.65 U2.66 U2.73 U2.74 U2.75 U2.76 U2.77 U2.78 U2.79 U2.80 U2.81 U2.82 U2.83 U2.84 U2.113 U2.114 U2.115 U2.116 U2.117 U2.118 U2.119 U2.120 U2.121 U2.122 U2.123 U2.124 U2.125 U2.126 U2.127 U2.128 U2.129 U2.130 U2.131 U2.132 U2.133 U2.134 U2.135 U2.136 U2.137 U2.138 U2.139 U2.140 U2.141 U2.142 U2.143 U2.144

## Polygon pours and split planes (outlines as drawn)
GND on Bottom Layer "Bottom Layer-GND" (solid, remove dead copper, pour order 12): -21,2984 -21,-13 2510,0 2510,73 2510,2304 733.11,2304 702,2335.11 702,2954 19,2954 -24,2997
GND on Top Layer "Top Layer-GND" (solid, remove dead copper, pour order 10): -21,2984 -21,-13 2510,0 2510,73 2510,2304 733.11,2304 702,2335.11 702,2954 19,2954 -24,2997

## Keep-outs
Keep-Out Layer:
  the board outline again, w5

## Silkscreen, mask and mechanical layers (free items; w line width, h text height)
Mechanical 2:
  circle w0.25: c4927.78,6202.6 r0.12
  circle w0.25: c4337.23,6202.6 r0.12
  circle w0.25: c4337.23,6202.6 r0.12
  circle w0.25: c4632.5,6793.15 r0.12
  circle w0.25: c4927.78,6202.6 r0.12
  circle w0.25: c4337.23,6202.6 r0.12
  circle w0.25: c4337.23,6202.6 r0.12
  circle w0.25: c4632.5,6793.15 r0.12
  circle w0.25: c4927.78,6202.6 r0.12
  circle w0.25: c4337.23,6202.6 r0.12
  circle w0.25: c4337.23,6202.6 r0.12
  circle w0.25: c4632.5,6793.15 r0.12
Mechanical 15:
  lines w10: -1.1,-79.01 -1.1,-59.01 ; 58.9,-89.01 -1.1,-69.01 ; 58.9,-49.01 -1.1,-69.01 ; 977.99,-69.01 -1.1,-69.01 ; 1529.82,-69.01 2508.9,-69.01 ; 2448.9,-89.01 2508.9,-69.01 ; 2448.9,-49.01 2508.9,-69.01 ; 2508.9,-79.01 2508.9,-59.01 ; 2582.99,55.1 2602.99,-4.9 ; 2582.99,2889.1 2602.99,2949.1 ; 2592.99,-4.9 2612.99,-4.9 ; 2592.99,2949.1 2612.99,2949.1 ; 2602.99,1191.18 2602.99,-4.9 ; 2602.99,1753.01 2602.99,2949.1 ; 2622.99,55.1 2602.99,-4.9 ; 2622.99,2889.1 2602.99,2949.1
  text "2954 (mil)" at 2567,1743.01 h60 r270
  text "2510 (mil)" at 987.99,-105 h60

## Text inside footprints (layer, text, board x,y; h text height)
P1: Top Overlay "2" at 1510,2057 h39.37; Top Overlay "1" at 1530,1957 h39.37; Top Overlay "7" at 1970,1957 h39.37; Top Overlay "8" at 1970,2057 h39.37